# Altium PCB roneMotorBoard-v11.PcbDoc (part 1 of 2)
Units mil, origin at the board's own origin, x right, y up, seen from the top; angles counter-clockwise.
Board outline 3702 x 3936.38 mil, 2 copper layers (Top Layer, Bottom Layer); 103 components, 87 nets, 402 pads, 269 vias.
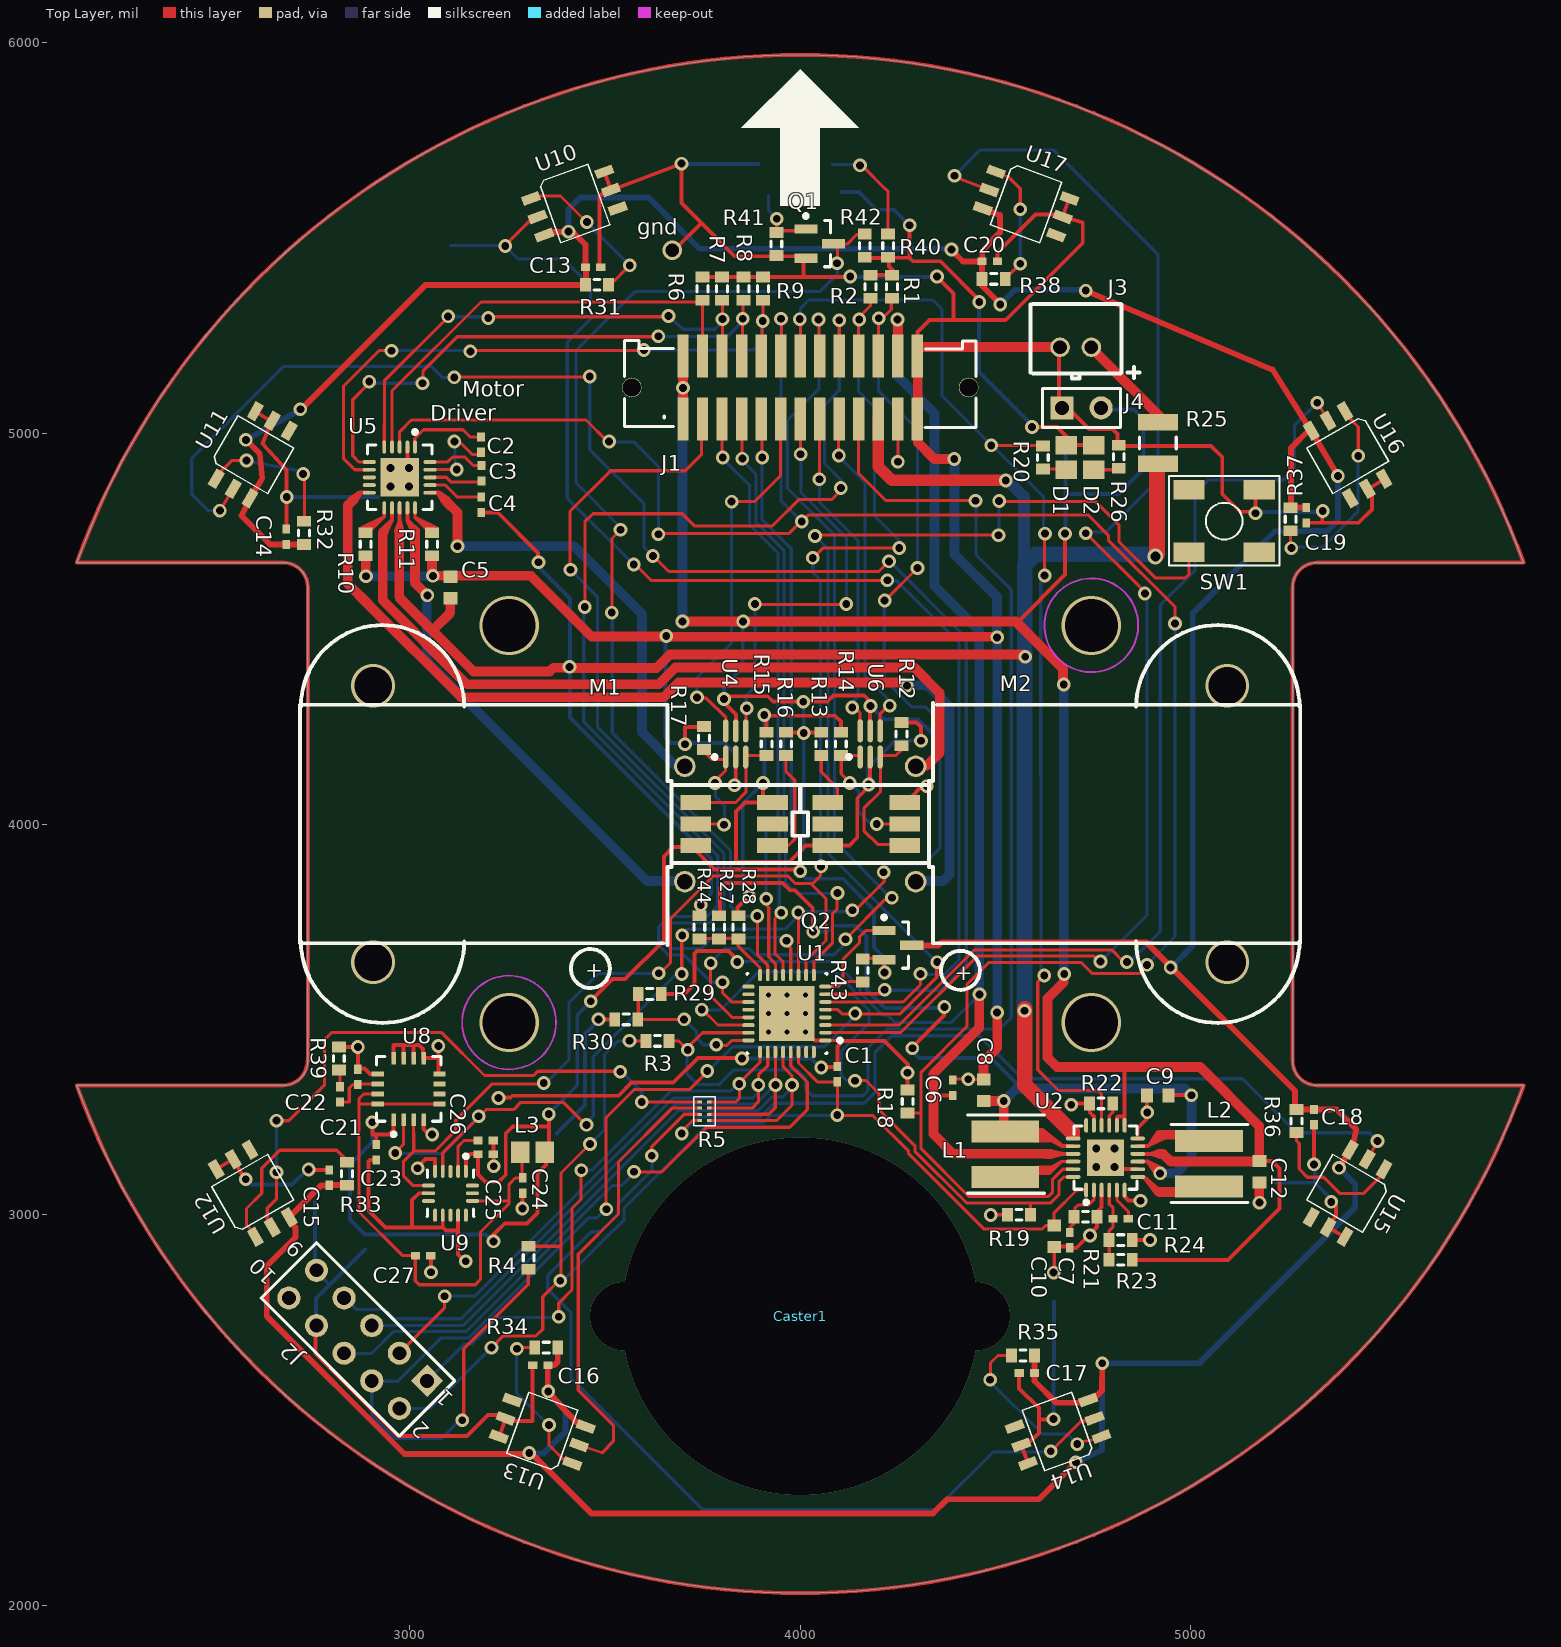
[diagram p0: Top Layer view]
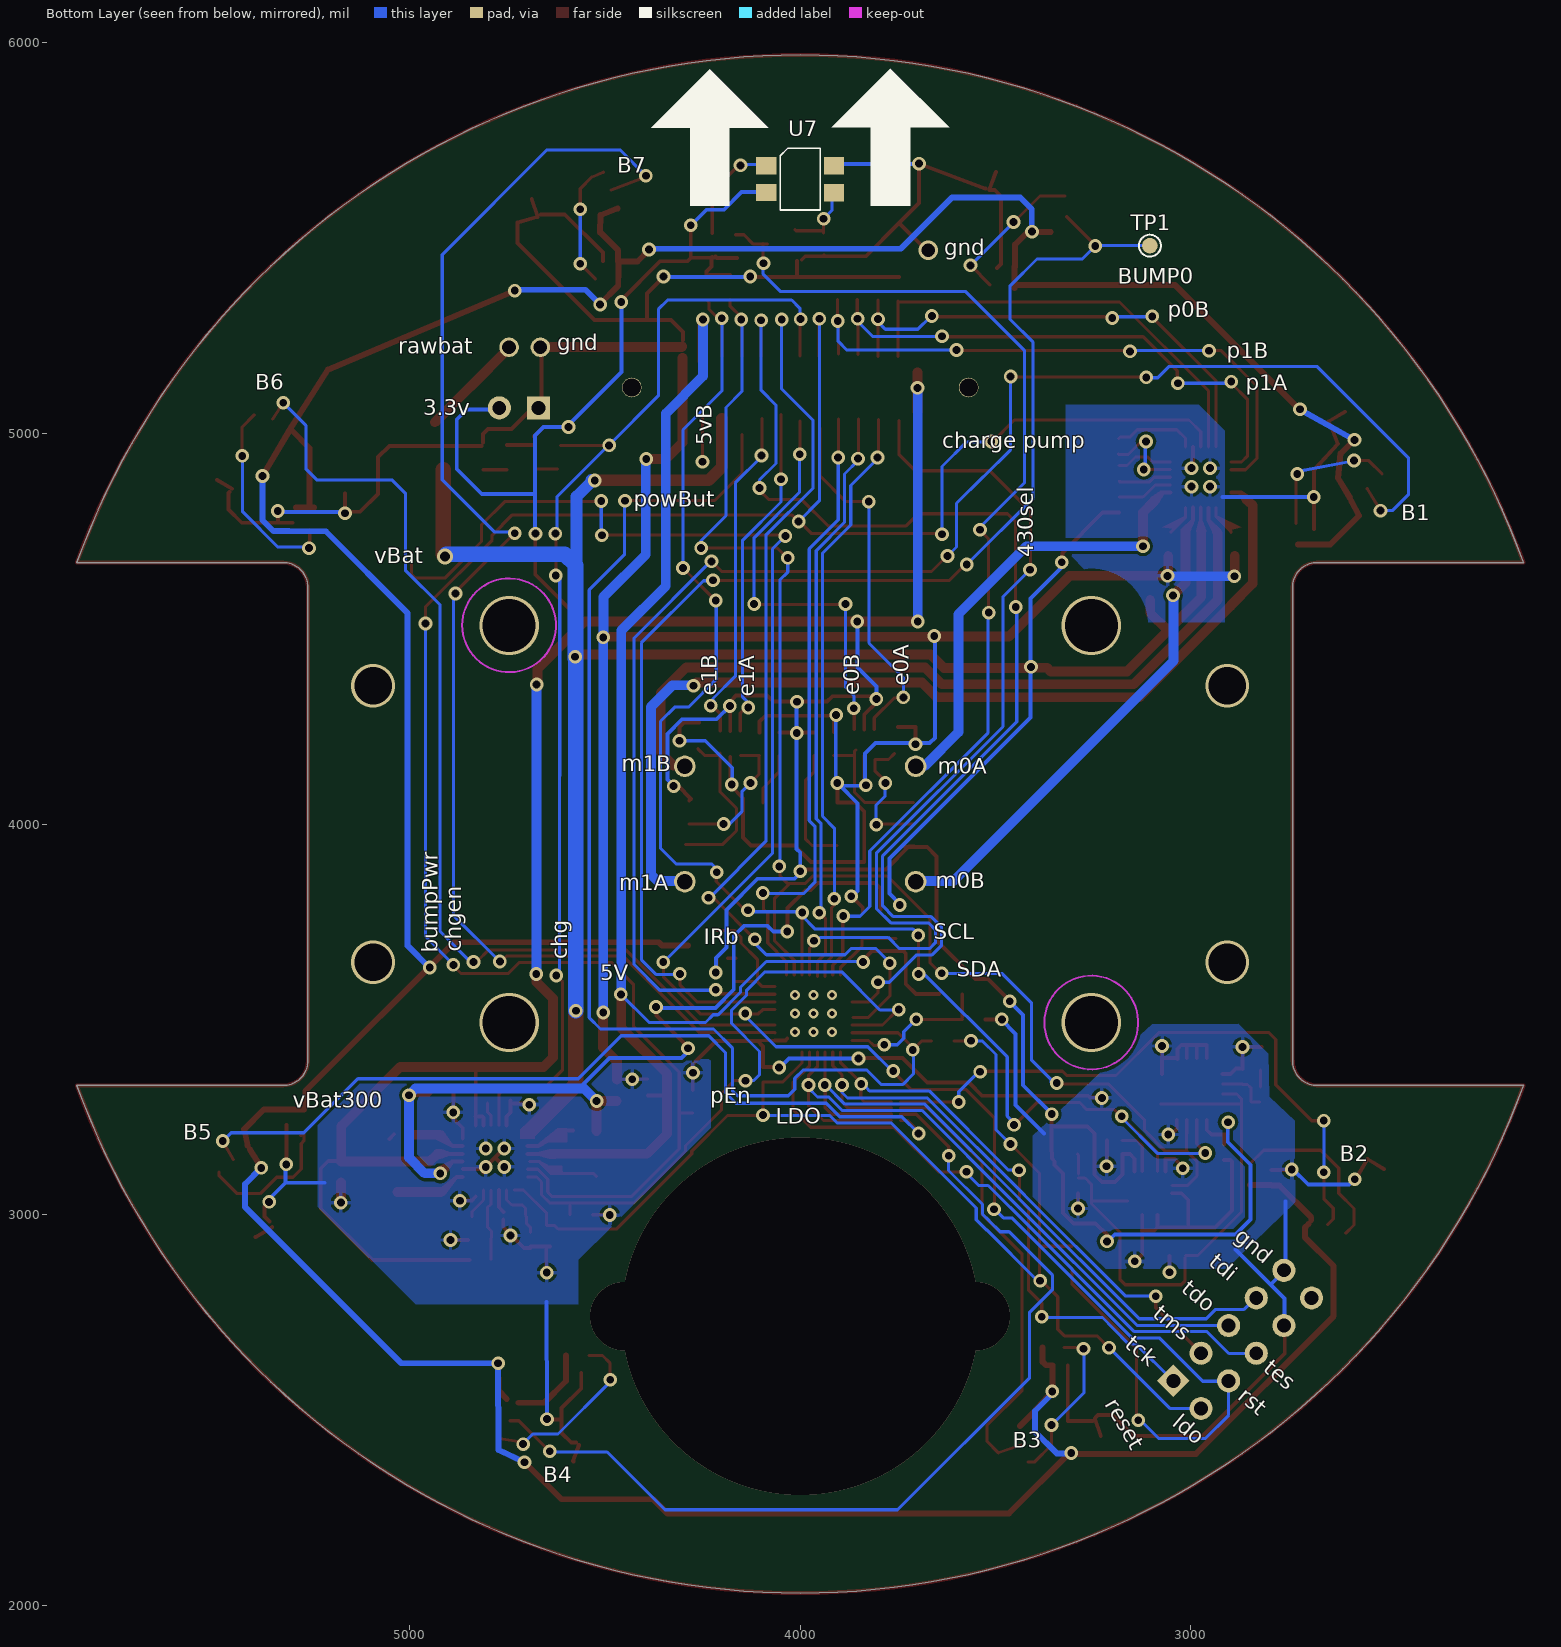
[diagram p1: Bottom Layer view, seen from below]

## Layer stack, top to bottom
Top Layer: signal copper 1.4
Dielectric: dielectric 12.6, FR-4, Dk 4.8
Bottom Layer: signal copper 1.4

## Board outline
2149,3331 2677,3331 ccw(c2677,3394) 2740,3394 2740,4606 ccw(c2677,4606) 2677,4669 2149,4669 cw(c4000,4000) 5851,4669 5323,4669 ccw(c5323,4606) 5260,4606 5260,3394 ccw(c5323,3394) 5323,3331 5851,3331 cw(c4000,4000)

## Design rules (kind name [scope] priority, off if disabled: settings)
Clearance [All] p1: gap=8
PolygonConnect [All] p1: connectstyle=Relief reliefconductorwidth=10 reliefentries=4 polygonreliefangle="90 Angle"
RoomDefinition Power [InComponentClass('Power')] p1: confinementstyle=ConfineIn formatcopy=TRUE lockcomponents=FALSE outline 0,0 2000,0 2000,1000 0,1000
RoomDefinition MSP430 [InComponentClass('MSP430')] p2: confinementstyle=ConfineIn formatcopy=TRUE lockcomponents=FALSE outline 5896,2379.5 6086.5,2379.5 6086.5,2588.5 5896,2588.5
RoomDefinition motorEncoder [InComponentClass('motorEncoder')] p3: confinementstyle=ConfineIn formatcopy=TRUE lockcomponents=FALSE outline 0,0 2000,0 2000,1000 0,1000
RoomDefinition LineCliffSensors [InComponentClass('LineCliffSensors')] p4: confinementstyle=ConfineIn formatcopy=TRUE lockcomponents=FALSE outline 0,0 2000,0 2000,1000 0,1000
RoomDefinition GyroAccel [InComponentClass('GyroAccel')] p5: confinementstyle=ConfineIn formatcopy=TRUE lockcomponents=FALSE outline 0,0 2000,0 2000,1000 0,1000
RoomDefinition BumpSensors [InComponentClass('BumpSensors')] p6: confinementstyle=ConfineIn formatcopy=TRUE lockcomponents=FALSE outline 5896,2087 6060,2087 6060,2348.5 5896,2348.5
RoutingVias RoutingVias_4 [(IsVia AND InNetClass('All Nets'))] p1: holewidth=20 width=35 viastyle="Through Hole" minholewidth=20 minwidth=35 maxholewidth=20 maxwidth=35
RoutingVias RoutingVias_3 [(IsVia AND InNetClass('All Nets'))] p2: holewidth=20 width=35 viastyle="Through Hole" minholewidth=20 minwidth=35 maxholewidth=20 maxwidth=35
RoutingVias RoutingVias_2 [(IsVia AND InNetClass('All Nets'))] p3: holewidth=20 width=35 viastyle="Through Hole" minholewidth=20 minwidth=35 maxholewidth=20 maxwidth=35
RoutingVias RoutingVias_1 [(IsVia AND InNetClass('All Nets'))] p4: holewidth=20 width=35 viastyle="Through Hole" minholewidth=20 minwidth=35 maxholewidth=20 maxwidth=35
RoutingVias [All] p5: holewidth=20 width=35 viastyle="Through Hole" minholewidth=20 minwidth=35 maxholewidth=20 maxwidth=35
SMDNeckDown [All] p1: percent=50.000
SilkscreenOverComponentPads [All] p1: minsilkscreentomaskgap=10
SolderMaskExpansion [All] p1: expansion=4
Width "Schematic Width Constraint_8" [InNet('3.3V')] p1: maxlimit=100 minlimit=10 preferedwidth=25 minimp=50.000000 maximp=50.000000 favimp=50.000000
Width "Schematic Width Constraint_7" [InNet('VBAT')] p2: maxlimit=50 minlimit=10 preferedwidth=25 minimp=50.000000 maximp=50.000000 favimp=50.000000
Width "Schematic Width Constraint_6" [InNet('VBAT +300')] p3: maxlimit=25 minlimit=10 preferedwidth=25 minimp=50.000000 maximp=50.000000 favimp=50.000000
Width "Schematic Width Constraint_5" [InNet('NetJ3_1')] p4: maxlimit=25 minlimit=10 preferedwidth=25 minimp=50.000000 maximp=50.000000 favimp=50.000000
Width "Schematic Width Constraint_4" [InNet('NetL2_1')] p5: maxlimit=25 minlimit=10 preferedwidth=25 minimp=50.000000 maximp=50.000000 favimp=50.000000
Width "Schematic Width Constraint_3" [InNet('NetL2_2')] p6: maxlimit=25 minlimit=10 preferedwidth=25 minimp=50.000000 maximp=50.000000 favimp=50.000000
Width "Schematic Width Constraint_2" [InNet('5VUSB')] p7: maxlimit=25 minlimit=10 preferedwidth=25 minimp=50.000000 maximp=50.000000 favimp=50.000000
Width "Schematic Width Constraint" [InNet('GND')] p8: maxlimit=25 minlimit=10 preferedwidth=25 minimp=50.000000 maximp=50.000000 favimp=50.000000
Width "Schematic Width Constraint_12" [InNet('MOT_0B')] p9: maxlimit=25 minlimit=10 preferedwidth=20 minimp=50.000000 maximp=50.000000 favimp=50.000000
Width "Schematic Width Constraint_11" [InNet('MOT_0A')] p10: maxlimit=25 minlimit=10 preferedwidth=20 minimp=50.000000 maximp=50.000000 favimp=50.000000
Width "Schematic Width Constraint_10" [InNet('MOT1_B')] p11: maxlimit=25 minlimit=10 preferedwidth=20 minimp=50.000000 maximp=50.000000 favimp=50.000000
Width "Schematic Width Constraint_9" [InNet('MOT1_A')] p12: maxlimit=25 minlimit=10 preferedwidth=20 minimp=50.000000 maximp=50.000000 favimp=50.000000
Width MotorWidth [InNetClass('MotorNets')] p13: maxlimit=25 minlimit=8 preferedwidth=25
Width [All] p14: maxlimit=8 minlimit=8 preferedwidth=8
27 further rules are at their usual default settings.

## Classes and differential pairs
component class LineCliffSensors: Q1 R40 R41 R42 U7
component class power: C6 C7 C8 C9 C10 C11 C12 D1 D2 J3 J4 L1 L2 R18 R19 R20 R21 R22 R23 R24 R25 R26 R27 R28 R29 R30 R44 U2 U3
component class MSP430: C1 J1 J2 R1 R2 R3 R4 R5 R43 SW1 U1
component class GyroAccel: C21 C22 C23 C24 C25 C26 C27 L3 R39 U8 U9
component class BumpSensors: C13 C14 C15 C16 C17 C18 C19 C20 Q2 R31 R32 R33 R34 R35 R36 R37 R38 TP1 U10 U11 U12 U13 U14 U15 U16 U17
component class motorEncoder: C2 C3 C4 C5 Caster1 CasterBack1 M1 M2 M? R6 R7 R8 R9 R10 R11 R12 R13 R14 R15 R16 R17 U4 U5 U6

## Components (designator, comment, footprint, x,y, rotation, side; value= is the part's Value field where it differs from the comment)
C1 "Cap Semi" CAPC1005L 4095,3360 r270 top
C2 "Cap Semi" CAPC1005L 3183,4971 r90 top
C3 "Cap Semi" CAPC1005L 3184.31,4897.63 r90 top
C4 "Cap Semi" CAPC1005L 3184,4817 r90 top
C5 "Cap Semi" CAPC1608L 3105,4605 r270 top
C6 "Cap Semi" CAPC1005L 4390,3325 r270 top
C7 "Cap" CAPC1005L 4690,2935 r90 top
C8 "Cap" CAPC1608L 4469.5,3318.5 r270 top
C9 "Cap" CAPC1608L 4915,3305 r180 top
C10 "Cap" CAPC1608L 4650,2945 r270 top
C11 "Cap" CAPC1005L 4820,2990 r0 top
C12 "Cap" CAPC1608L 5175,3110 r90 top
C13 "Cap Semi" CAPC1005L 3470,5425 r180 top
C14 "Cap Semi" CAPC1005L 2685,4735 r270 top locked
C15 "Cap Semi" CAPC1005L 2795,3095 r270 top
C16 "Cap Semi" CAPC1005L 3335,2615 r0 top
C17 "Cap Semi" CAPC1005L 4580,2595 r0 top
C18 "Cap Semi" CAPC1005L 5315,3250 r90 top locked
C19 "Cap Semi" CAPC1005L 5295,4790 r90 top
C20 "Cap Semi" CAPC1005L 4485,5440 r180 top locked
C21 "Cap Semi" CAPC1005L 2868,3353 r90 top
C22 "Cap Semi" CAPC1005L 2822.5,3308 r90 top
C23 "Cap Semi" CAPC1005L 2915,3160 r90 top
C24 "Cap Semi" CAPC1005L 3290,3075 r90 top
C25 "Cap Semi" CAPC1005L 3195,3155 r180 top
C26 "Cap Semi" CAPC1005L 3195,3190 r180 top
C27 "Cap Semi" CAPC1005L 3035,2895 r180 top
Caster1 "non connect" "3/4\"CASTER2" 4000,2740 r180 top locked
D1 "Charge" INDC2012L 4681,4938 r270 top
D2 "Power" INDC2012L 4751,4938 r270 top
J1 "HCOMM/MOT" "HeaderSM 13x2" 4000,5117 r90 top locked
J2 "JTAG" HDR2X5 3045,2575 r135 top locked
J3 "Bat" BatteryConnJST 4705,5220 r180 top
J4 "3.3V conn" HDR1X2 4670,5065 r0 top
L1 "3.3uH" IndPow 4525,3155 r90 top
L2 "2.2uH" IndPow 5046,3131 r90 top
L3 "Inductor" INDC2012L 3315,3160 r0 top
M1 "motorEncoder_V7b" motorEncoder_V7b 3830,4000 r180 top locked
M2 "motorEncoder_V7b" motorEncoder_V7b 4170,4000 r0 top locked
Q1 "NPN" SOT-23 4050,5485 r0 top
Q2 "P-Mosfet" SOT-23 4250,3690 r0 top
R1 "Res3" RESC1608L 4235,5375 r90 top
R2 "Res3" RESC1608L 4180,5375 r90 top
R3 "Res3" RESC1608L 3635,3445 r180 top
R4 "Res3" RESC1608L 3305,2890 r90 top
R5 "0" "4-RES ARRAY" 3755,3265 r180 top
R6 "Res3" RESC1608L 3750,5370 r90 top
R7 "Res3" RESC1608L 3800,5370 r90 top
R8 "Res3" RESC1608L 3855,5370 r90 top
R9 "Res3" RESC1608L 3905,5370 r90 top
R10 "Res3" RESC1608L 2888,4716 r270 top
R11 "Res3" RESC1608L 3058,4716 r270 top
R12 "" RESC1608L 4259,4230 r270 top
R13 "" RESC1608L 4054,4205 r90 top
R14 "" RESC1608L 4104,4205 r270 top
R15 "" RESC1608L 3914,4205 r90 top
R16 "" RESC1608L 3964,4205 r90 top
R17 "" RESC1608L 3754,4220 r270 top
R18 "Res3" RESC1608L 4275,3290 r270 top
R19 "Res3" RESC1608L 4560,3000 r0 top
R20 "Res3" RESC1608L 4621,4938 r270 top
R21 "Res3" RESC1608L 4730,2995 r180 top
R22 "Res3" RESC1608L 4770,3285 r180 top
R23 "Res3" RESC1608L 4820,2885 r180 top
R24 "Res3" RESC1608L 4820,2935 r0 top
R25 "Res3" RESC3225L 4915,4975 r90 top
R26 "Res3" RESC1608L 4815,4940 r270 top
R27 "Res3" RESC1608L 3792,3735.5 r90 top
R28 "Res3" RESC1608L 3842,3735.5 r270 top
R29 "Res3" RESC1608L 3615,3565 r0 top
R30 "Res3" RESC1608L 3555,3500 r0 top
R31 "Res3" RESC1608L 3480,5380 r180 top
R32 "Res3" RESC1608L 2730,4745 r270 top
R33 "Res3" RESC1608L 2840,3105 r270 top
R34 "Res3" RESC1608L 3350,2660 r0 top
R35 "Res3" RESC1608L 4570,2640 r0 top
R36 "Res3" RESC1608L 5270,3240 r90 top locked
R37 "Res3" RESC1608L 5255,4780 r90 top
R38 "Res3" RESC1608L 4495,5395 r180 top locked
R39 "Res3" RESC1608L 2819.5,3400 r270 top
R40 "Res3" RESC1608L 4225,5480 r90 top
R41 "Res3" RESC1608L 3939,5484 r270 top
R42 "Res3" RESC1608L 4165,5480 r270 top
R43 "Res3" RESC1608L 4160,3625 r90 top
R44 "Res3" RESC1608L 3742,3735.5 r90 top
SW1 "reset button" SwitchTall-TL330 5085,4775 r0 top
TP1 "TestPoint" TestPoint 3105,5480 r180 bottom
U1 "MSP430" MSP430_32PIN 3966,3515 r180 top locked
U2 "LTC3566" QFN-24 4781,3146 r90 top
U4 "schmit trigger" DCK(R-PDSO-C6) 3835,4205 r90 top
U5 "MOTOR-A3906" QFN-20 2975,4887 r270 top locked
U6 "schmit trigger" DCK(R-PDSO-C6) 4179,4205 r90 top
U7 "GP2S27TJ000F" GP2S27J0000F 4000,5650 r180 bottom locked
U8 "L3G4200D" L3G2004D 2998,3322 r90 top locked
U9 "MMA8452Q" MMA8452Q 3105,3055 r270 top locked
U10 "SFH9240-Z" SFH9240-Z 3422,5588 r20 top locked
U11 "SFH9240-Z" SFH9240-Z 2599,4945 r60 top locked
U12 "SFH9240-Z" SFH9240-Z 2599,3055 r120 top locked
U13 "SFH9240-Z" SFH9240-Z 3340,2445 r160 top locked
U14 "SFH9240-Z" SFH9240-Z 4660,2445 r200 top locked
U15 "SFH9240-Z" SFH9240-Z 5401,3055 r240 top locked
U16 "SFH9240-Z" SFH9240-Z 5401,4945 r300 top locked
U17 "SFH9240-Z" SFH9240-Z 4578,5588 r340 top locked

## Footprints (in the part's own frame and the unit in brackets; to place one, negate y for a bottom-side part, rotate by r counter-clockwise, add the part's x,y. Pads: shape width x height; smd on the part's side, far side on the other; paste and mask are expansions set on the pad)
"3/4\"CASTER2" [mil] "3/4\" caster for board"
"4-RES ARRAY" [mm]
  rect 0.3x0.2 smd mask+0.05: 1(-0.3,0.6) 2(-0.3,0.2) 3(-0.3,-0.2) 4(-0.3,-0.6) 5(0.3,-0.6) 6(0.3,-0.2) 7(0.3,0.2) 8(0.3,0.6)
  silkscreen extent -0.71,-0.94 0.69,0.94
BatteryConnJST [mil] "Connector for Battery"
  round 50 hole 35: 1(-40,0) 2(40,0)
  silkscreen extent -163,-110 116,80
CAPC1005L [mm] "Chip Capacitor, Body 1.0x0.5mm, IPC High Density"
  rect 0.6x0.5 smd: 1(-0.5,0) 2(0.5,0)
  body extent -0.55,-0.3 0.55,0.3, height 1.3
CAPC1608L [mm] "Chip Capacitor, Body 1.6x0.8mm, IPC High Density"
  rect 0.8x0.9 smd: 1(-0.7,0) 2(0.7,0)
  body extent -0.87,-0.48 0.87,0.48, height 1.3
DCK(R-PDSO-C6) [mm] "TSOP, 6-Leads, Body 2.2x1.4mm (max), Pitch 0.65mm, IPC Medium Density"
  oval 1.5x0.35 smd: 1(-0.85,0.65) 2(-0.85,0) 3(-0.85,-0.65) 4(0.85,-0.65) 5(0.85,0) 6(0.85,0.65)
  silkscreen extent -0.97,1.25 -0.73,1.5, body extent -0.7,-1.07 0.7,1.08, height 1.1
GP2S27J0000F [mil] "Phototransistor Output, Compact Reflective Photointerrupter"
  rect 52x44 smd: 1(-86.61,34.45) 2(-86.61,-33.74) 3(86.61,-34.45) 4(86.61,34.45)
  silkscreen extent -51,-79 51,79, body extent -59,-78 59,79, height 67
HDR1X2 [mm] "Connector; Header; 2 Position"
  rect 1.5x1.5 hole 0.9: 1(0,0)
  round 1.5 hole 0.9: 2(2.54,0)
  silkscreen extent -1.27,-1.27 3.81,1.27
HDR2X5 [mm] "Connector; Header; 5x2 Position"
  rect 1.5x1.5 hole 0.9: 1(0,0)
  round 1.5 hole 0.9: 2(0,2.54) 3(2.54,0) 4(2.54,2.54) 5(5.08,0) 6(5.08,2.54) 7(7.62,0) 8(7.62,2.54) 9(10.16,0) 10(10.16,2.54)
  silkscreen extent -1.27,-1.27 11.43,3.81
"HeaderSM 13x2" [mm]
  rect 2.795x0.74 smd: 1(-2.032,7.62) 2(2.033,7.62) 3(-2.032,6.35) 4(2.033,6.35) 5(-2.032,5.08) 6(2.033,5.08) 7(-2.032,3.81) 8(2.033,3.81) 9(-2.032,2.54) 10(2.033,2.54) 11(-2.032,1.27) 12(2.033,1.27) 13(-2.032,0) 14(2.033,0) 15(-2.032,-1.27) 16(2.033,-1.27) 17(-2.032,-2.54) 18(2.033,-2.54) 19(-2.032,-3.81) 20(2.033,-3.81) 21(-2.032,-5.08) 22(2.033,-5.08) 23(-2.032,-6.35) 24(2.033,-6.35) 25(-2.032,-7.62) 26(2.033,-7.62)
  round 1.27 hole 1.19: c1(0,10.947) c2(0,-10.947)
  silkscreen extent -2.59,-11.43 3.06,11.43
INDC2012L [mm] "Chip Inductor, Body 2.0x1.2mm, IPC High Density"
  rect 1.2x1.4 smd: 1(-0.8,0) 2(0.8,0)
  body extent -1.1,-0.7 1.1,0.7, height 0.55
IndPow [mil]
  rect 56.5x173 smd: 1(-58.25,0) 2(58.25,0)
  silkscreen extent -100,-100 100,97
L3G2004D [mm] "gyroscope"
  rect 0.8x0.3 smd: 1(-2,0.975) 2(-2,0.325) 3(-2,-0.325) 4(-2,-0.975) 9(2,-0.975) 10(2,-0.325) 11(2,0.325) 12(2,0.975)
  rect 0.3x0.8 smd: 5(-0.975,-2) 6(-0.325,-2) 7(0.325,-2) 8(0.975,-2) 13(0.975,2) 14(0.325,2) 15(-0.325,2) 16(-0.975,2)
  silkscreen extent -3.07,-2.1 2.1,2.1, body extent -2.08,-2.08 2.07,2.07, height 1.1
MMA8452Q [mm] "accelerometer-v9"
  oval 0.85x0.25 smd: 1(-1.425,1) 2(-1.425,0.5) 3(-1.425,0) 4(-1.425,-0.5) 5(-1.425,-1) 9(1.425,-1) 10(1.425,-0.5) 11(1.425,0) 12(1.425,0.5) 13(1.425,1)
  oval 0.25x0.85 smd: 6(-0.5,-1.425) 7(0,-1.425) 8(0.5,-1.425) 14(0.5,1.425) 15(0,1.425) 16(-0.5,1.425)
  silkscreen extent -2.52,-1.52 1.5,1.53, body extent -1.5,-1.5 1.5,1.5, height 1
motorEncoder_V7b [mm] "Precision Wire Wound Inductor, 2-Leads, Body 2.5x2.3mm, IPC Medium Density"
  rect 2x1 smd: A(-2.524,1.4) C(2.476,1.4) E1(2.476,0) E2(2.476,-1.4) K(-2.524,-1.4) NC(-2.524,0)
  round 1.4 hole 1: M1(3.185,3.75) M2(3.185,-3.75)
  Mechanical 1 keep-out region: 4.496,-7.849 28.118,-7.849 28.118,7.645 4.496,7.645
  silkscreen extent -4.83,-12.93 28.18,12.93
MSP430_32PIN [mm] "32 pin QFN"
  oval 0.8x0.25 smd: 1(-2.5,1.75) 2(-2.5,1.25) 3(-2.5,0.75) 4(-2.5,0.25) 5(-2.5,-0.25) 6(-2.5,-0.75) 7(-2.5,-1.25) 8(-2.5,-1.75) 17(2.5,-1.75) 18(2.5,-1.25) 19(2.5,-0.75) 20(2.5,-0.25) 21(2.5,0.25) 22(2.5,0.75) 23(2.5,1.25) 24(2.5,1.75)
  oval 0.25x0.8 smd: 9(-1.75,-2.5) 10(-1.25,-2.5) 11(-0.75,-2.5) 12(-0.25,-2.5) 13(0.25,-2.5) 14(0.75,-2.5) 15(1.25,-2.5) 16(1.75,-2.5) 25(1.75,2.5) 26(1.25,2.5) 27(0.75,2.5) 28(0.25,2.5) 29(-0.25,2.5) 30(-0.75,2.5) 31(-1.25,2.5) 32(-1.75,2.5)
  rect 3.6x3.6 smd: 33(0,0)
  silkscreen extent -3.58,-2.6 2.6,2.6, body extent -2.58,-2.57 2.57,2.58, height 1
QFN-20 [mm] "QFN, 20-Leads, Body 4.2x4.2mm (max), Pitch 0.50mm, IPC Medium Density"
  oval 0.85x0.25 smd: 1(-1.975,1) 2(-1.975,0.5) 3(-1.975,0) 4(-1.975,-0.5) 5(-1.975,-1) 11(1.975,-1) 12(1.975,-0.5) 13(1.975,0) 14(1.975,0.5) 15(1.975,1)
  oval 0.25x0.85 smd: 6(-1,-1.975) 7(-0.5,-1.975) 8(0,-1.975) 9(0.5,-1.975) 10(1,-1.975) 16(1,1.975) 17(0.5,1.975) 18(0,1.975) 19(-0.5,1.975) 20(-1,1.975)
  rect 2.5x2.5 smd: 21(0,0)
  silkscreen extent -3.07,-2.1 2.1,2.1, body extent -2.07,-2.07 2.07,2.07, height 0.8
QFN-24 [mm] "QFN, 24-Leads, Body 4.1x4.1mm (max), Pitch 0.50mm, IPC Medium Density"
  oval 0.95x0.25 smd: 1(-2.1,1.25) 2(-2.1,0.75) 3(-2.1,0.25) 4(-2.1,-0.25) 5(-2.1,-0.75) 6(-2.1,-1.25) 13(2.1,-1.25) 14(2.1,-0.75) 15(2.1,-0.25) 16(2.1,0.25) 17(2.1,0.75) 18(2.1,1.25)
  oval 0.25x0.95 smd: 7(-1.25,-2.1) 8(-0.75,-2.1) 9(-0.25,-2.1) 10(0.25,-2.1) 11(0.75,-2.1) 12(1.25,-2.1) 19(1.25,2.1) 20(0.75,2.1) 21(0.25,2.1) 22(-0.25,2.1) 23(-0.75,2.1) 24(-1.25,2.1)
  rect 2.4x2.4 smd: 25(0,0)
  silkscreen extent -3.02,-2.05 2.05,2.05, body extent -2.05,-2.05 2.05,2.05, height 0.8
RESC1608L [mm] "Chip Resistor, Body 1.6x0.8mm, IPC High Density"
  rect 0.7x0.9 smd: 1(-0.75,0) 2(0.75,0)
  silkscreen extent -0.2,-0.35 0.2,0.35, body extent -0.85,-0.48 0.85,0.48, height 0.9
RESC3225L [mm] "Chip Resistor, Body 3.2x2.5mm, IPC High Density"
  rect 1.1x2.6 smd: 1(-1.35,0) 2(1.35,0)
  silkscreen extent -0.4,-1.2 0.4,1.2, body extent -1.68,-1.32 1.68,1.32, height 0.9
SFH9240-Z [mil] "Reflective Interrupter with Schmitt-Trigger"
  rect 47x24 smd: 1(-100,50) 2(-100,0) 3(-100,-50) 4(100,-50) 5(100,0) 6(100,50)
  silkscreen extent -67,-83 67,83, body extent -59,-78 59,79, height 67
SOT-23 [mm] "SOT23, 3-Leads, Body 3.0x2.5mm (max), Pitch 0.95mm, IPC Medium Density"
  rect 1.5x0.6 smd: 1(-0.9,0.95) 2(-0.9,-0.95) 3(0.9,0)
  silkscreen extent -1.02,-1.5 0.7,1.92, body extent -0.7,-1.5 0.7,1.5, height 1.2
SwitchTall-TL330 [mil] "Small SMDTall Tact Switch E-Switch TL330"
  rect 80x50 smd: 1(-90,80) 2(90,80) 3(-90,-80) 4(90,-80)
  silkscreen extent -141,-114 141,115
TestPoint [mil]
  round 40 smd: 1(0,0)
  silkscreen extent -28,-28 28,28

## Part data
C1 C2 C3 C4 C5 C6 C13 C14 C15 C16 C17 C18 C19 C20 C21 C22 C23 C24 C25 C26 C27: "Capacitor (Semiconductor SIM Model)"
C7 C8 C9 C10 C11 C12: "Capacitor"
Caster1: library part "Caster 3/4in", "This is just a space saver to get the caster onto the pcb"
D1 D2: library part LED2, "Typical RED, GREEN, YELLOW, AMBER GaAs LED"
J1: library part HCOMM/HMOT, "Header, 2X20, 50mil, IDC"
J2: library part "Header 5X2", "Header, 5-Pin, Dual row"
J3: library part BatteryConnJST
J4: library part "Header 2", "Header, 2-Pin"
L1 L2: library part Inductor
R1 R2 R3 R4 R6 R7 R8 R9 R10 R11 R18 R19 R20 R21 R22 R23 R24 R25 R26 R27 R28 R29 R30 R31 R32 R33 R34 R35 R36 R37 R38 R39 R40 R41 R42 R43 R44: "Resistor"
R5: library part "4 Res Array"
R12 R13 R14 R15 R16 R17: library part Res3, "Resistor"
SW1: library part Switch-TL330
U1: library part MSP430_32pin
U8: "3axis gyroscope, SPI"

## Via types
v1: diameter 35, hole 20, Top Layer to Bottom Layer, 239 vias
v2: diameter 25.98, hole 12.99, Top Layer to Bottom Layer, tented top, 9 vias
v3: diameter 35, hole 20, Top Layer to Bottom Layer, tented top, 8 vias
v4: diameter 112, hole 96, Top Layer to Bottom Layer, 4 vias
v5: diameter 152, hole 136, Top Layer to Bottom Layer, 4 vias
v6: diameter 175, hole 175, Top Layer to Bottom Layer, 2 vias
v7: diameter 915, hole 915, Top Layer to Bottom Layer, 1 vias
v8: diameter 40, hole 25, Top Layer to Bottom Layer, 1 vias
v9: diameter 50, hole 35, Top Layer to Bottom Layer, 1 vias

## Nets (pads, with @x,y where several pads share a name; then routed paths per layer and width w, separated by ;. In a path a pad name is that pad's centre, name@x,y a point inside that pad or via, vN(x,y) a via of type N, cw(c..) or ccw(c..) an arc to the next point about the centre after c; other vN are vias at no path point)
3.3LDO: C1.2 C10.1 J2.2 R3.2 R4.2 U1.30 U2.1 | length 3377.5
  Top Layer w8: v1@3209.25,2658.75 3240.5,2690 3324,2690 3341,2707 3341,2790 3388,2837 3388,3107 v1(3462,3181) ; R4.2@3305,2919.53 3385.03,2919.53 ; v1@3570.5,3444.5 R3.2@3606,3444.5 ; U1.30@3995.53,3416.57 3995.53,3388.47 4044,3340 4095.5,3340 v1@4095.5,3255 ; v1@4095.5,3254 4186,3254 4277.5,3162.5 4277.5,3155.75 4469.25,2964 4620,2964 4629,2973 4649,2973 4649,3004 4708.48,3063.48 U2.1@4731.79,3063.48
  Bottom Layer w8: J2.2@2977.5,2504.5 3054,2504.5 3209.5,2660 v1(3210,2660) ; v1@3386.25,2835.75 3397.25,2835.75 3522.85,2961.35 3523.85,2961.35 3549.5,2987 3549.5,3017.5 3767,3235 3905.6,3235 3925.1,3254.5 v1@4101.5,3254.5 ; v1@3464,3182.5 3499,3217.5 3499,3410 3533.5,3444.5 v1@3572.5,3444.5
  other v1: 3386,2831 4095,3255 3563,3445.5
3.3V: C12.2 C23.2 C25.2 D1.1 D2.1 J1.1 J1.2 J4.2 L3.2 M1.C M2.C Q2.2 R1.2 R2.2 R13.2 R16.2 R23.1 R40.1 R42.2 R43.2 U2.10 U2.13 U2.14 U4.5 U6.5 U7.2 U8.1 U9.1 | length 11945.9
  Top Layer w10: v1@2906,3237 2906,3205 2948,3205 2959.61,3216.61 U8.1@2959.61,3243.26 ; C23.2@2915,3179.69 2915,3203 ; U9.1@3144.37,3111.1 3144.37,3143.37 3156,3155 C25.2@3175,3155 ; C25.2@3175.31,3155 3175.31,3103.19 3194.5,3084 3228,3084 3246.5,3102.5 3246.5,3208 3264.5,3226 3357,3226 ; v1@3214,2935 3214,2948 3244,2978 3301,2978 3328,3005 3328,3106 3349,3127 3349,3137 3355.5,3143.5 L3.2@3355.5,3159 ; L3.2@3357,3162 3357,3226 ; v1@3357,3258.5 3357,3226 ; v1@3466,3549.5 3519.5,3603 3552,3603 3651,3702 3651,3917 3674.88,3940.88 M1.C@3732.56,3940.88 ; M1.C@3708.31,3943 3721.5,3943 3780.5,3884 v1@4001,3884 ; v1@3805,4325 v1(3805,4320) 3805,4310.87 3836,4279.87 U4.5@3836,4241.46 ; v1@3808,4327 3917,4327 3931,4313 v1(4008,4313) v1@4009,4313 ; R16.2@3964,4234.53 R13.2@4052.53,4234.53 ; v1@4010,4313 4069,4313 4085,4329 4164,4329 v1@4175,4318 ; R42.2@4162,5448 4212.47,5448 R40.1@4217,5452.53 ; R43.2@4165,3656.5 Q2.2@4185.5,3656.5 ; U6.5@4179,4238.46 v1@4179,4302 ; R2.2@4180,5404.53 R1.2@4230.47,5404.53 ; R40.1@4213.47,5449 R40.1@4225,5449 ; v1@4214.57,3620.43 Q2.2@4214.57,3652.6 ; R40.1@4225,5450.47 R40.1@4225,5449 ; R40.1@4227,5450 R40.1@4227,5449 ; R1.2@4230.53,5399.53 4240,5399.53 4240,5414 4227,5427 R40.1@4227,5449 ; 4278,5449 R40.1@4227,5449 ; v1(4280,5532) 4280,5448 4288,5440 4359,5440 v1@4460.25,5338.75 ; M2.C@4284,4060 4279.5,4064.5 4313,4098 v1@4323,4098 ; 4554.8,4514.8 4678,4638 v1@4678,4743 ; v1(4593,5016) 4657,5016 D1.1@4681,4992 ; 4604.5,4458.5 4604.5,4465.11 ; D1.1@4681,4969.5 D2.1@4749.5,4969.5 ; D2.1@4750.5,4970 D2.1@4751,4969.5 ; U2.14@4810.5,3228.86 4810.5,3248.96 4812.54,3251 4830.5,3251 ; U2.13@4830.21,3228.83 4830.21,3272.71 ; 4830.21,3273.98 4830.21,3378 ; R23.1@4846.5,2884 5095,2884 5227,3016 5227,3118.33 5207.77,3137.56 C12.2@5175,3137.56 ; U2.10@4863.68,3156 4921,3156 ; R40.1@4225,5449 R40.1@4227,5449
  Top Layer w25: v1(3699,4518) v1(3854,4518) 4551.61,4518 4604.5,4465.11 4672.5,4397.11 v1@4672.5,4360.5 ; J1.1@3700,5055 v1(3700,5116) J1.2@3700,5156 ; v1@4674.5,3617.5 4674.5,3595.5 4632.5,3553.5 4632.5,3402.65 4657.15,3378 5023.72,3378 5174,3227.72 5174,3225 5174.5,3224.5 5174.5,3138.06 C12.2@5175,3137.56 ; 4921,3156 4928.28,3156 4948.28,3136 C12.2@5175,3136
  Bottom Layer w10: v1@2900,3239 2906,3233 2906,3186 2848,3128 2848,2988 2886,2950 3195,2950 v1@3213.5,2931.5 ; v1@3357,3250.5 3357,3259 3429.5,3331.5 3429.5,3511 v1@3464,3545.5 ; v1@3699,4520 v1@3705,4520 ; v1@3805,4326 3805,4352 3853,4400 v1@3853,4511 ; v1@4009,4311 v1(4009,4233) 4009,3936 4000,3927 4000,3875 4015,3860 4109,3860 4189,3780 4189,3684 4215.5,3657.5 v1@4215.5,3619.5 ; U7.2@4105,5617 4150.5,5617 4195.5,5572 4240,5572 v1(4280,5532) ; v1(4180,4302) 4214,4268 4302,4268 4340,4230 4340,4114 v1@4325,4099 ; v1@4457.5,5335.5 4457.5,5156.5 v1@4593,5021 ; v1(4593,5016) 4657,5016 4679,4994 4679,4844 ; v1@4679,4738.5 4679,4844 ; J4.2@4763.5,5071 4774,5060.5 4853.5,5060.5 4879,5035 4879,4908 4815,4844 4679,4844
  Bottom Layer w25: v1(3699,4518) 3699,4520 v1@3699,5115 ; v1@4674.5,3611 v1@4674.5,4354
  other v1: 3215,2932 2905,3237 3356.5,3257.5 3464,3546.5 4675.5,3616 4216,3620 4000,3879 4324,4097 4674.5,4357 4677.5,4743 4458,5336
5V_BOOST: J1.23 | length 110
  Top Layer w8: v1(4250,4927) J1.23@4250,5036.98
5VUSB: C6.2 J1.24 R29.2 U2.21 | length 3765.3
  Top Layer w10: R29.2@3644.53,3565 3704,3565 3730,3591 3730,3669 3735.5,3674.5 3816.5,3674.5 v1@3840,3651 ; 4341.31,3305.31 C6.2@4390,3305.31 ; 4641,3156 U2.21@4698.32,3156
  Top Layer w25: J1.24@4250,5184 J1.24@4250,5197.02 v1@4250,5289 ; v1@4458,3559 4458,3478 4341,3361 4341,3206.5 4391.5,3156 4641,3156
  Bottom Layer w8: v1@3839.5,3648 4086.5,3648 4153,3581.5 4153,3568.96 4209.96,3512 4222.5,3512 4242.5,3492 4386.5,3492 v1@4460.5,3566
  Bottom Layer w25: v1@4249,5290 4249,5146 4344,5051 4344,4609 4458,4495 v1@4458,3564
  other v1: 4459,3564 3839,3647 4249,5291
5VUSB_SENSE: R29.1 R30.2 U1.24 | length 382.6
  Top Layer w8: R30.2@3584.53,3500 v1@3701,3500 ; R30.2@3585.47,3504.53 R29.1@3585.47,3565 ; v1@3792,3433.5 3812.5,3433.5 3825.1,3446.1 U1.24@3867.57,3446.1
  Bottom Layer w8: v1@3704,3499.5 3735,3468.5 3735,3451.5 3751.5,3435 v1@3786.5,3435 ; v1@3783,3433 v1@3787,3437
  other v1: 3785,3435 3703,3500
BUMP0: TP1.1 U1.6 U10.2 | length 3449.1
  Top Layer w8: v1(3245,5479) v1@3245,5481 ; v1@3245,5484 v1@3245,5481 ; U10.2@3318,5554 v1@3245,5481 ; v1@3573.25,4668.25 3618.5,4623 4220,4623 v1@4226,4629 ; U1.6@4064.45,3544.5 4154.16,3544.5 ; 4154.19,3544.53 4263.53,3544.53 4308,3589 v1@4308,3609.5
  Bottom Layer w8: TP1.1@3105,5480 v1@3244,5480 ; v1(3245,5479) 3278,5446 3394,5446 3462.5,5377.5 ; 3463,5377 3463,5291.5 3404,5232.5 3404,4834 v1(3574,4664) ; v1@4226,4629 4232.5,4622.5 4247.5,4622.5 4406.5,4463.5 4406.5,3653 4368,3614.5 v1@4304,3614.5
  other v1: 4308,3616.5 4223,4624
BUMP1: U1.7 U11.2 | length 4042.2
  Top Layer w8: v1(2515,4802) U11.2@2549,4858 ; v1@3111,5144 v1@3467,5144 ; v1@3623,4687 3664,4646 4201,4646 v1(4227,4672) ; U1.7@4064.43,3564.21 4137.21,3564.21 4138.5,3565.5 4207,3565.5 v1@4216.5,3575
  Bottom Layer w8: v1(2515,4802) 2485,4802 2443,4844 2443,4936 2678,5171 3056,5171 ; 3056.75,5170.25 3085,5142 v1@3111.5,5142 ; v1(3461.5,5145) 3461.5,4958 3600,4820.5 3600,4709 v1(3623,4686) ; v1@4217,3574.5 4359,3574.5 4425,3640.5 4425,4476 v1@4229,4672
  other v1: 4216,3576 3114.5,5143
BUMP2: R5.5 U12.2 | length 1619
  Top Layer w8: U12.2@2650,2975 2636,2989 2636,3017 2660,3041 v1@2660,3108 ; v1(2660,3241) 2660,3240.5 2691,3240.5 2783,3332.5 2783,3448.5 2800.5,3466 3082.5,3466 3192,3356.5 3318,3356.5 3328.64,3367.14 v1@3538.5,3367.14 ; v1(3594.38,3288.62) R5.5@3743.19,3288.62
  Bottom Layer w8: v1@2660,3112 v1(2660,3241) ; v1@3540.75,3368.75 3594.38,3315.12 v1(3594.38,3288.62)
  other v1: 2660,3109 3539.5,3366
BUMP3: R5.6 U13.2 | length 1163.5
  Top Layer w8: U13.2@3433.97,2410.8 3493,2391 3522,2420 3522,2461 3432,2551 3432,2899 3535,3002 3535,3135 3672.87,3272.87 R5.6@3743.19,3272.87
BUMP4: R5.7 U14.2 | length 2459.7
  Top Layer w8: v1(3620,3151) 3620,3174 3703.13,3257.13 R5.7@3743.19,3257.13 ; v1@4640,2393 4720,2473 U14.2@4742,2473
  Bottom Layer w8: v1@3620.36,3150.36 3620.36,3113.36 3533.5,3026.5 3533.5,3001.78 3516.22,2984.5 3516.22,2984.22 3488.5,2956.5 3465.5,2956.5 3354,2845 3354,2809.5 3413,2750.5 3413,2583 3751,2245 4346,2245 4494,2393 v1@4640,2393
  other v1: 4641,2395
BUMP5: R5.8 U15.2 | length 2187.8
  Top Layer w8: v1(3697,3208) 3696,3209 3696,3213 3724.38,3241.38 R5.8@3743.19,3241.38 ; U15.2@5451,3141.6 5477.31,3186.98 v1@5477.49,3187.3
  Bottom Layer w8: v1(3697,3208) 3740,3251 3898.97,3251 3933.47,3285.5 4164.13,3285.5 4191,3312.37 4191,3415 4234,3458 4458,3458 4568,3348 4707,3348 ; 4721.08,3348 4707,3348 ; v1@5478,3188 5456,3210 5270,3210 5132,3348 4707,3348
  other v1: 5477.5,3189
BUMP6: U1.3 U16.2 | length 2661.4
  Top Layer w8: U1.3@4064.43,3485.47 4253.47,3485.47 4446,3678 4797,3678 4827,3648 v1@4835,3648 ; v1(5323,5078) U16.2@5350,5036
  Bottom Layer w8: v1@4836,3649 4845.5,3649 4921.5,3725 4921.5,4560.5 5010.5,4649.5 5010.5,4846.5 5044,4880 5236,4880 5265,4909 5265,5020 v1(5323,5078)
  other v1: 4836,3647
BUMP7: U1.2 U17.2 | length 3557
  Top Layer w8: U1.2@4064.43,3465.79 4144,3466 ; 4145,3466 4256.63,3466 4452.63,3662 4751.5,3662 v1@4765.5,3648 ; v1@4392.43,5657.12 U17.2@4484.03,5622.2 ; v1@4727,4739.5 4733.5,4742 v1@4881.25,4594.25
  Bottom Layer w8: v1(4395,5659) 4461,5725 4648,5725 4916,5457 4916,4881 4782,4747 v1@4747,4747 ; v1@4773,3652 4887.5,3766.5 4887.5,4579.5 4894.5,4586.5 v1@4886.5,4594.5
  other v1: 4768.5,3648 4882,4590 4730.5,4744
BUMP_PWR: C13.2 C14.2 C15.2 C16.2 C17.2 C18.2 C19.2 C20.2 Q2.3 R31.2 R32.2 R33.2 R34.2 R35.2 R36.2 R37.2 R38.2 U10.3 U11.3 U12.3 U13.3 U14.3 U15.3 U16.3 U17.3 | length 12256.9
  Top Layer w15: v1(2581.5,4983) 2617,4948 2623.5,4885.5 U11.3@2592.3,4833.4 ; U11.3@2589,4825 2570,4789 2643.53,4715.47 C14.2@2683.5,4715.47 ; C14.2@2685,4715.31 R32.2@2725.69,4715.31 ; U12.3@2692.3,2986.2 U12.3@2692.3,2993.4 2773.4,3074.5 C15.2@2793.5,3074.5 ; U12.3@2699,2976.5 2708.5,2967 2708.5,2942.5 2635,2869 2635,2740.5 2987.5,2388 3296,2388 v1@3305,2397 ; v1@2723,5061.5 3040.5,5379 R31.2@3445,5379 ; C15.2@2796,3076 R33.2@2849,3076 ; v1@3308,2393.5 3465.5,2236 4340,2236 4376,2272 4611,2272 v1(4705.5,2366.5) ; C16.2@3354,2615 3354,2549 3354.94,2547.95 3403.69,2493.31 U13.3@3438,2459 ; C16.2@3354.69,2615 3371,2615 3379.53,2623.53 R34.2@3379.53,2660 ; U10.3@3359,5515 3418,5515 3450.31,5482.69 C13.2@3450.31,5425 ; R31.2@3452,5371 C13.2@3452,5426.53 ; Q2.3@4287,3689.5 4354,3689.5 4362,3697.5 4885.5,3697.5 5266.5,3316.5 R36.2@5266.5,3276 ; v1@4387.5,5468.5 4416.5,5439.5 C20.2@4461,5439.5 ; R38.2@4465.31,5399.69 C20.2@4465.31,5440 ; R38.2@4465.47,5395 4465.47,5377.53 4513.5,5329.5 v1@4513.5,5328.5 ; C20.2@4466,5440 4466,5468 4512,5514 4511,5558 U17.3@4466.93,5575.22 ; R35.2@4599.53,2640 4599.53,2574.47 4655,2519 U14.3@4721,2519 ; v1(4730.5,5365) 5208.5,5163 U16.3@5307.7,5006.6 v1(5376,4890.5) ; U14.3@4751,2528.5 4772.5,2551 v1(4773,2620) ; R37.2@5244,4809.69 C19.2@5290,4809.69 ; R37.2@5255.5,4815 5255.5,4961.5 U16.3@5302,5008 ; R36.2@5270,3269.53 5372.47,3269.53 5423,3219 U15.3@5414,3177 ; v1@5378.29,3120.45 U15.3@5407.7,3166.6
  Bottom Layer w15: v1(2581.5,4983) v1@2722.26,5061.43 ; v1@3305,2397 3312.5,2389.5 3343.5,2389.5 3399,2445 3399,2498 v1@3352,2545 ; v1(3407,5516) 3407.5,5516.5 3407.5,5574 3437,5603.5 3494.5,5603.5 3494.55,5603.55 3610.98,5603.55 3742.52,5472 v1@4385.5,5472 ; v1(4512,5329.5) 4549.5,5367 v1@4727.5,5367 ; v1(4705.5,2366.5) 4772.5,2398.5 v1(4773,2620) 5021,2620 5420.5,3019.5 5420.5,3078.5 v1(5379,3120) ; v1(4948,3633) 4949,3633 5004.5,3688.5 5004.5,4539.5 5213.5,4748.5 5309,4749.5 5348,4749.5 5376,4777.5 v1(5376,4890.5)
  other v1: 3306.5,2390.5 3355,2548 2721,5061.5 4387,5470
BUMP_SEL: Q2.1 R43.1 U1.8 | length 312.8
  Top Layer w8: U1.8@4064.43,3583.9 4096.9,3583.9 4109.5,3596.5 ; R43.1@4171,3596.5 4109.5,3596.5 ; Q2.1@4214,3727 4167.5,3727 4151.5,3711 4151.5,3695.5 4109.5,3653.5 4109.5,3596.5
CHRG: J1.14 R20.1 U2.16 | length 2952.6
  Top Layer w8: J1.14@4001,5198.02 v1@4001,5291 ; v1(4489,4969) R20.1@4613,4969 ; v1@4622,3606 4614,3602 4608,3596 4608,3371 4661,3318 4762,3318 4771.16,3308.84 U2.16@4771.16,3228.83 ; v1@4622.5,4744 v1@4631,4735.5 ; v1@4625,4634.5 v1@4625,4735.5
  Bottom Layer w8: v1@4001,5294 4001,5320 4022,5341 4339,5341 4363,5317 4363,5096 v1@4489,4970 ; v1@4494.5,4965.5 4622.5,4837.5 v1@4622.5,4743 ; v1@4615.47,4630.5 4615.99,3612 v1@4620.5,3601.5
  other v1: 4624.5,3612.5 4625.5,4636 4626.5,4743 3999,5292
CHRGEN: J1.12 R18.2 U2.23 U5.3 | length 5448.8
  Top Layer w8: U5.3@2975,4964.76 2975,5004 3005,5034 3452,5034 v1@3509,4977 ; v1@3642,4743 3970.5,4743 v1@4004,4776.5 ; J1.12@3952,5197.02 v1@3952,5290 ; v1@4004,4773 4022,4791 4736.5,4791 4788.5,4739 4788.5,4726.5 4959,4556 v1@4959,4513.5 ; R18.2@4275,3260.47 4309.47,3260.47 ; U2.23@4698.32,3116.63 4671.63,3116.63 4646,3091 4646,3058 4634.5,3046.5 4432,3046.5 4309.5,3169 4309.5,3365 4427,3482.5 4427,3590 4483,3646 4718.5,3646 4747,3617.5 4868,3617.5 v1@4884.5,3634
  Bottom Layer w8: v1@3511.5,4978 3574,4978 3637,4915 3637,4737 v1@3640.5,4733.5 ; v1@3951,5292 3951,4827 v1(4004,4774) ; v1@4887,3640.5 4887.5,3640.5 4959,3712 v1@4959,4505.5
  other v1: 4887.5,3639.5 4959,4513 3637,4741.5 3511,4979 3951,5293
CLIFF1: Q1.3 R42.1 U1.15 | length 2771.2
  Top Layer w8: v1@3504,4541 3518.5,4553.5 3518.5,4730.5 v1@3541,4753 ; v1@3891,3762 3891,3664 3916.79,3638.21 U1.15@3916.79,3613.43 ; Q1.3@4084.43,5484 4120,5484 4144,5508 R42.1@4165,5508 ; v1@4095,5430 Q1.3@4095,5486
  Bottom Layer w8: v1@3504,4541 3519,4526 3519,4233.8 3822,3930.8 3822,3789 3847,3764 v1@3891,3764 ; v1@3541.5,4757.5 3426.5,4872.5 3426.5,5212 3577.5,5363 4051,5363 4095,5407 v1@4095,5430
  other v1: 3890,3764.5 3517.5,4541 3540,4753 4094,5435